# Altium PCB DistBoard.PcbDoc
Units mil, origin at the board's own origin, x right, y up, seen from the top; angles counter-clockwise.
Board outline 2505 x 2000 mil, 2 copper layers (Top Layer, Bottom Layer); 17 components, 9 nets, 48 pads, 7 vias.
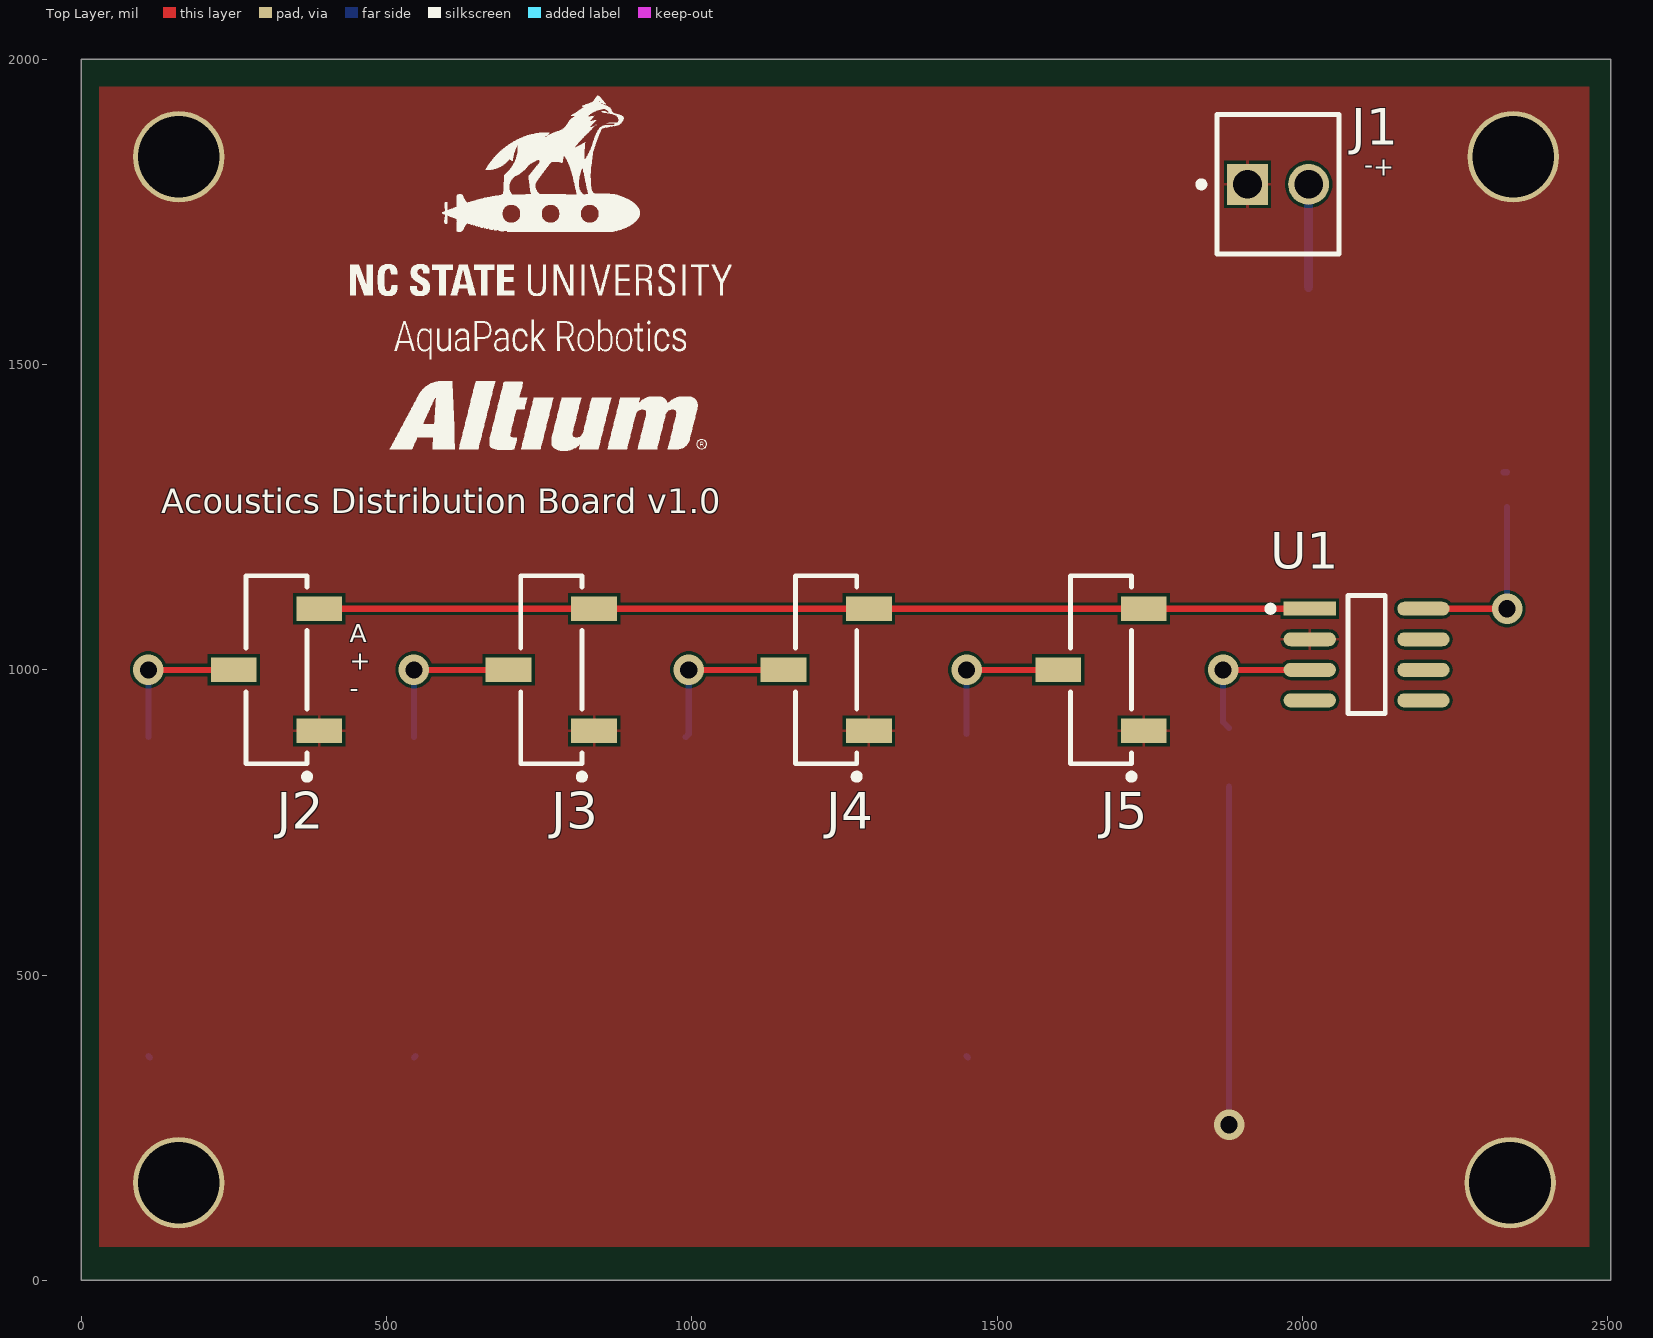
[diagram p0: Top Layer view]
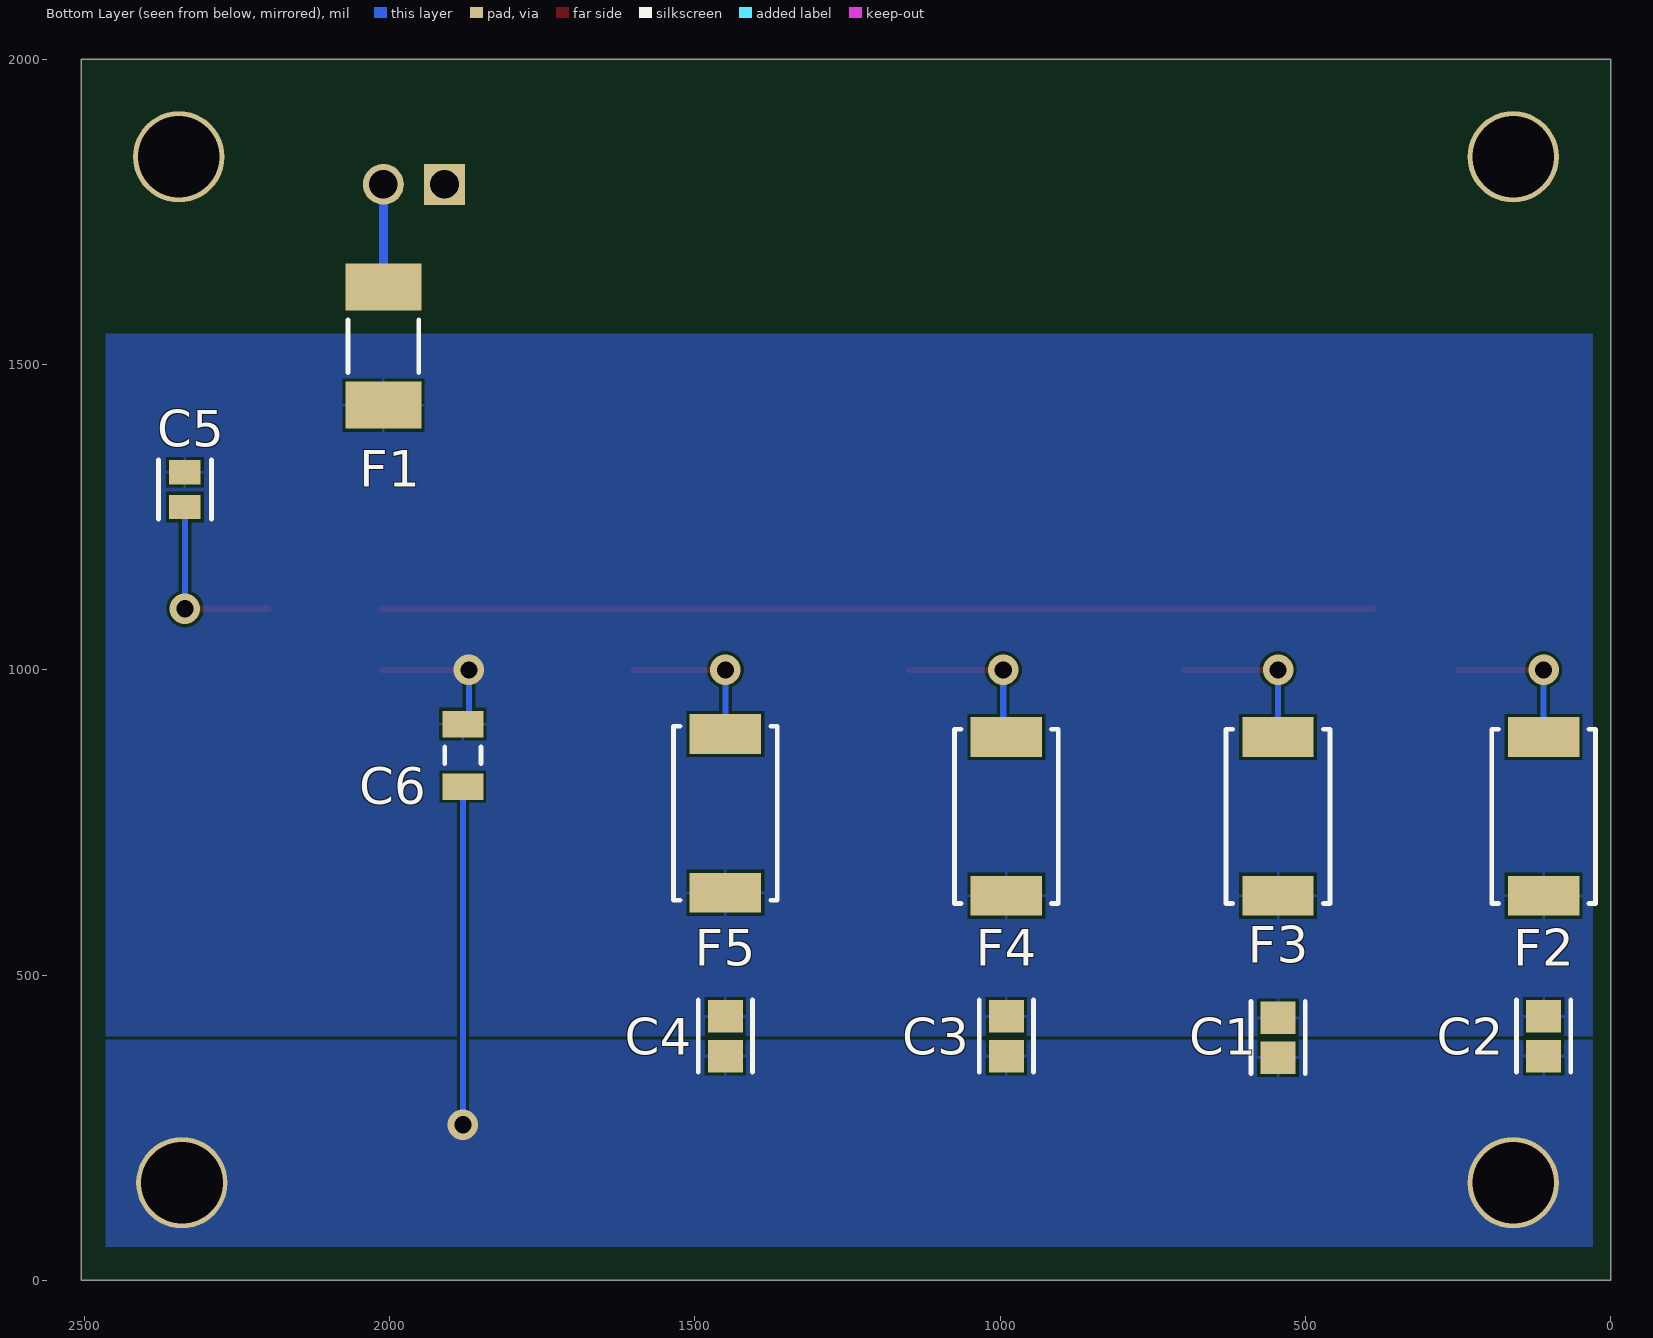
[diagram p1: Bottom Layer view, seen from below]
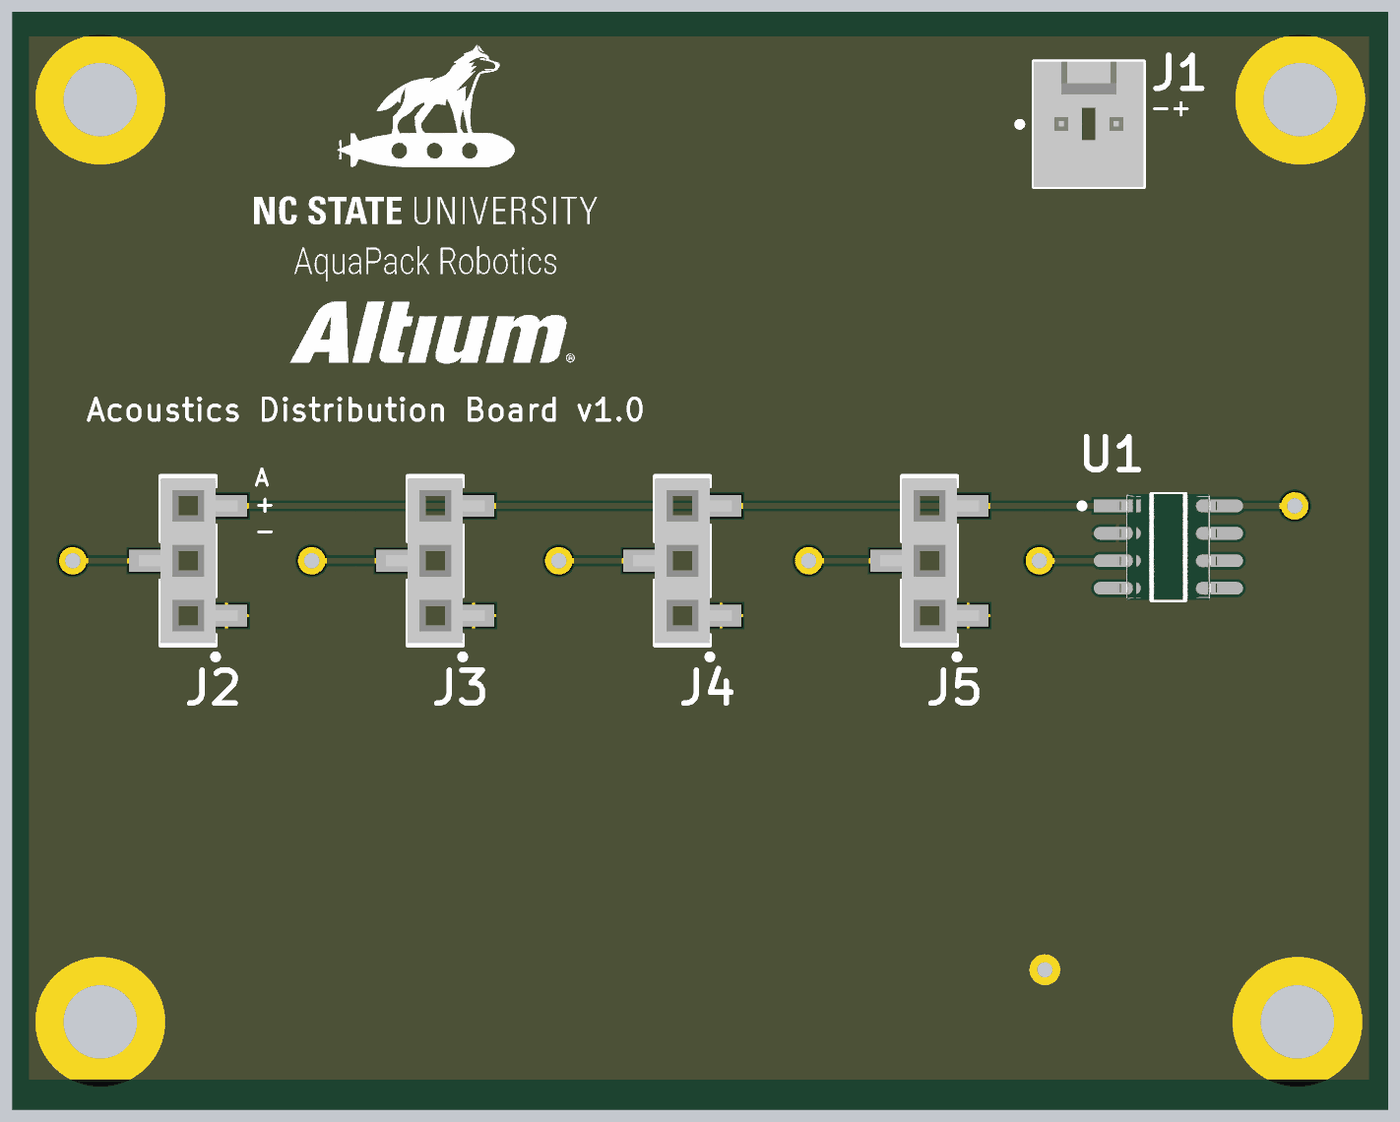
[diagram p2: 3D render of the assembled board from above, using the file's embedded part models]
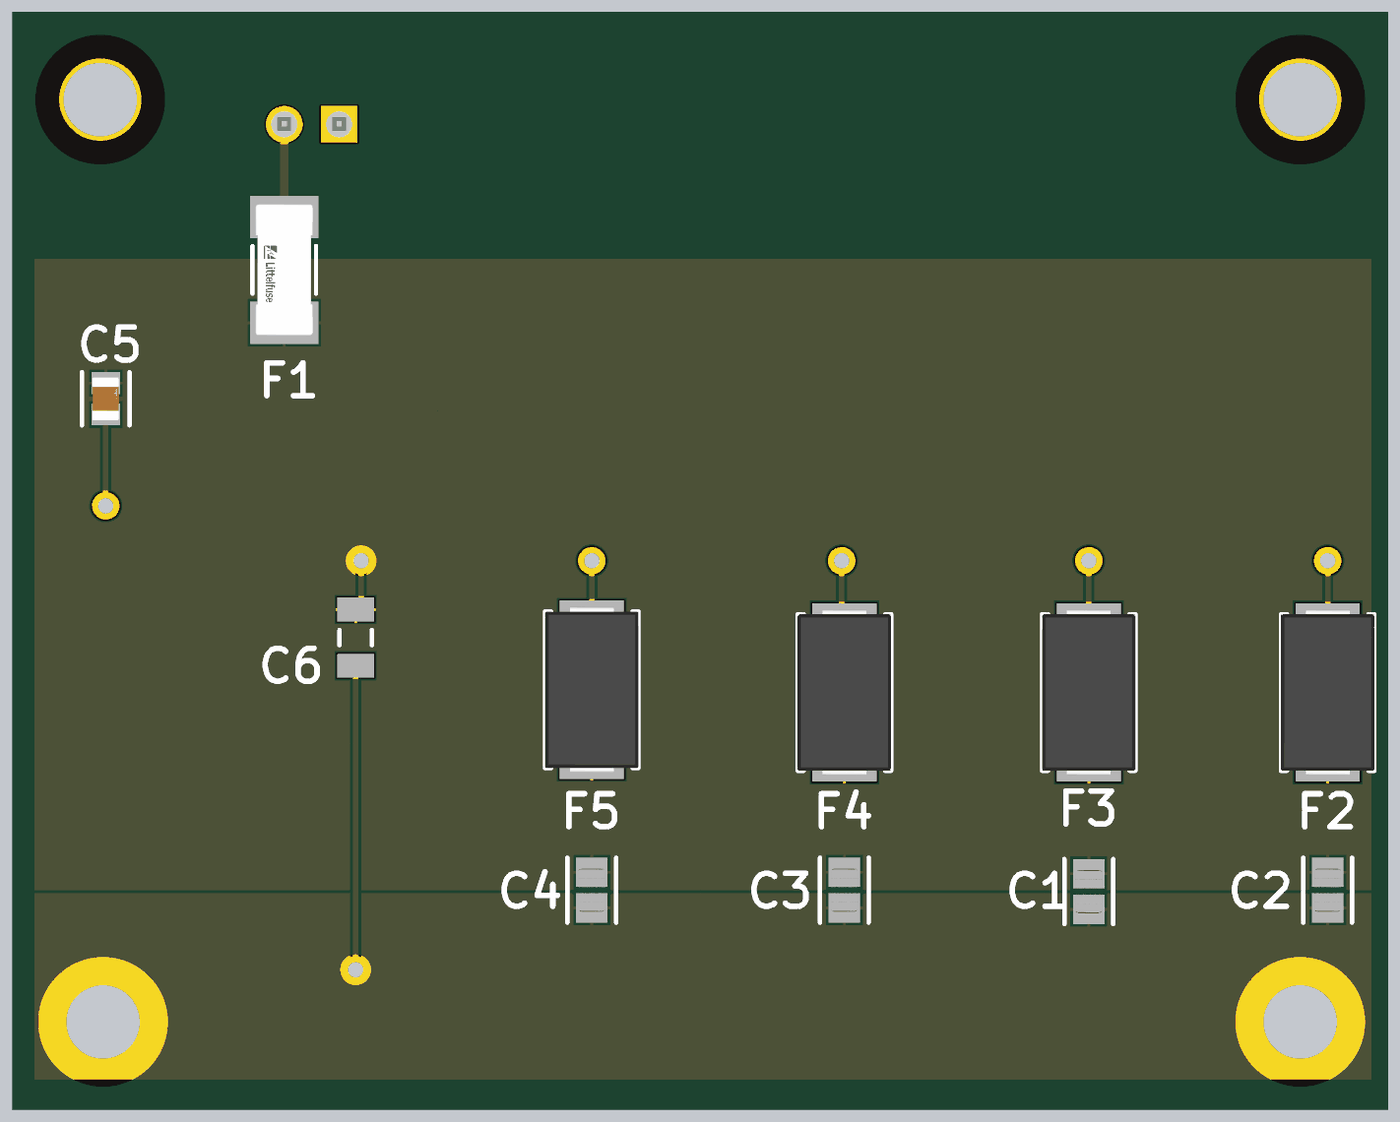
[diagram p3: 3D render of the assembled board from below, using the file's embedded part models]

## Layer stack, top to bottom
Top Solder: solder mask 0.4, Solder Resist, Dk 3.5
Top Layer: signal copper 1.4
Dielectric 1: dielectric 12.6, FR-4, Dk 4.8
Bottom Layer: signal copper 1.4
Bottom Solder: solder mask 0.4, Solder Resist, Dk 3.5

## Board outline
0,2000 0,0 2505,0 2505,2000

## Design rules (kind name [scope] priority, off if disabled: settings)
BoardOutlineClearance [All] p1: gap=7.87 ignorepadtopadclearanceinfootprint=FALSE
Clearance [All] p1: gap=5 ignorepadtopadclearanceinfootprint=FALSE except(9.84: Arc-Hole Track-Hole SMDPad-Hole THPad-Hole Via-Hole Fill-Hole Poly-Hole Region-Hole Text-Hole)
ComponentClearance [All] p1: gap=5 collisioncheckmode=3 verticalgap=5 showdistances=TRUE
DiffPairsRouting [All] p1: maxlimit=10 minlimit=5 mostfreqgap=5 toplayer_minwidth=5 toplayer_maxwidth=1000 toplayer_prefwidth=5 bottomlayer_minwidth=5 bottomlayer_maxwidth=1000 bottomlayer_prefwidth=5 maxuncoupledlength=500
Height [All] p1: minheight=0 maxheight=71497.94 prefheight=500
HoleSize [All] p1: absolutevalues=TRUE maxlimit=248.03 minlimit=11.81 maxpercent=80.000 minpercent=20.000
HoleToHoleClearance [All] p1: gap=9.84 allowstackedmicrovias=FALSE
MinimumAnnularRing [All] p1: minimumring=3
MinimumSolderMaskSliver [All] p1: minsoldermaskwidth=0
PlaneClearance [All] p1: clearance=5
PlaneConnect PlaneConnectPowerPads [InPadClass('PowerPads')] p1: planeconnectstyle=Direct reliefexpansion=20 reliefentries=4 reliefconductorwidth=10 reliefairgap=10
PlaneConnect [All] p2: pad.planeconnectstyle=Relief pad.reliefexpansion=11.81 pad.reliefentries=4 pad.reliefconductorwidth=5 pad.reliefairgap=5 via.planeconnectstyle=Direct via.reliefexpansion=11.81 via.reliefentries=4 via.reliefconductorwidth=5 via.reliefairgap=5
PolygonConnect PolygonConnectPowerPads [All vs (InPadClass('PowerPads'))] p1: connectstyle=Direct reliefconductorwidth=10 reliefentries=4 polygonreliefangle="90 Angle" airgapwidth=10
PolygonConnect [All] p2: thpad.connectstyle=Relief thpad.reliefconductorwidth=5 thpad.reliefentries=4 thpad.polygonreliefangle="90 Angle" thpad.airgapwidth=5 smdpad.connectstyle=Relief smdpad.reliefconductorwidth=5 smdpad.reliefentries=4 smdpad.polygonreliefangle="90 Angle" smdpad.airgapwidth=5 via.connectstyle=Direct via.reliefconductorwidth=5 via.reliefentries=4 via.polygonreliefangle="90 Angle" via.airgapwidth=5
RoutingVias [All] p1: holewidth=11.81 width=23.62 viastyle="Through Hole" minholewidth=11.81 minwidth=23.62 maxholewidth=23.62 maxwidth=259.84
SilkToSilkClearance [All] p1: silktosilkclearance=0
SilkToSolderMaskClearance [IsPad] p1: minsilkscreentomaskgap=5 clearancetoexposedcopper=TRUE
SolderMaskExpansion [All] p1: expansion=2.95 istentingtop=FALSE
Width [All] p1: maxlimit=1000 minlimit=5 preferedwidth=5 minimp=50.000000 maximp=50.000000 favimp=50.000000
20 further rules are at their usual default settings.

## Components (designator, comment, footprint, x,y, rotation, side; value= is the part's Value field where it differs from the comment)
C1 "GCJ21BR71H105KA01L" FP-GCJ21B-0_3-IPC_B 545,397.49 r90 bottom value=1uF
C2 "GCJ21BR71H105KA01L" FP-GCJ21B-0_3-IPC_B 110,400 r90 bottom value=1uF
C3 "GCJ21BR71H105KA01L" FP-GCJ21B-0_3-IPC_B 990,400 r90 bottom value=1uF
C4 "GCJ21BR71H105KA01L" FP-GCJ21B-0_3-IPC_B 1450,400 r90 bottom value=1uF
C5 "GCD21BR71H104KA01L" FP-GCD21B-0_15-IPC_C 2335,1295 r90 bottom value=100nF
C6 "C1206C105K5RACTU" CAPC3216X110X50LL20T25 1880,860 r270 bottom
F1 "045201.5MRL" FP-0452-MFG 2010,1530 r270 bottom value=0.093Ω
F2 "0459.250UR" LFUS-459_V 110,760 r90 bottom
F3 "0459.250UR" LFUS-459_V 545,760.08 r90 bottom
F4 "0459.250UR" LFUS-459_V 990,760 r90 bottom
F5 "0459.250UR" LFUS-459_V 1450,765 r90 bottom
J1 "22-27-2021" MOLX-22-27-2021_V 1960,1795 r0 top
J2 "SSM-103-L-SV" SMTC-SSM-103-X-SV 320,1000 r90 top
J3 "SSM-103-L-SV" SMTC-SSM-103-X-SV 770,1000 r90 top
J4 "SSM-103-L-SV" SMTC-SSM-103-X-SV 1220,1000 r90 top
J5 "SSM-103-L-SV" SMTC-SSM-103-X-SV 1670,1000 r90 top
U1 "TLE2426CDR" FP-D0008A-IPC_B 2105,1025 r0 top

## Footprints (in the part's own frame and the unit in brackets; to place one, negate y for a bottom-side part, rotate by r counter-clockwise, add the part's x,y. Pads: shape width x height; smd on the part's side, far side on the other; paste and mask are expansions set on the pad)
CAPC3216X110X50LL20T25 [mm] "Chip Capacitor, 2-Leads, Body 3.20x1.60mm, IPC High Density"
  rect 1.1x1.7 smd: 1(-1.3,0) 2(1.3,0)
  silkscreen extent -0.35,-0.75 0.35,0.75, body extent -1.7,-0.9 1.7,0.9, height 1.1
FP-0452-MFG [mil]
  rect 77x124 smd paste+0 mask+0: 1(-96.5,0) 2(96.5,0)
  silkscreen extent -43,-58 43,58, body extent -120,-53 120,53, height 116
FP-D0008A-IPC_B [mil]
  rect 85.4x22.92 smd paste+0 mask+0: 1(-93.06,75)
  rrect100% 85.4x22.92 smd paste+0 mask+0: 2(-93.06,25) 3(-93.06,-25) 4(-93.06,-75) 5(93.06,-75) 6(93.06,-25) 7(93.06,25) 8(93.06,75)
  silkscreen extent -162,-97 31,97, body extent -146,-106 146,106, height 10
FP-GCD21B-0_15-IPC_C [mil]
  rect 39.6x51.5 smd paste+0 mask+0: 1(-28.59,0) 2(28.59,0)
  silkscreen extent -48,-43 48,43, body extent -39,-25 39,25, height 55
FP-GCJ21B-0_3-IPC_B [mil]
  rect 53.28x57.33 smd paste+0 mask+0: 1(-32.49,0) 2(32.49,0)
  silkscreen extent -59,-44 59,44, body extent -39,-25 39,25, height 57
LFUS-459_V [mm] "SMD, 2-Leads, Body 7.24x4.32mm"
  rect 1.65x2.97 smd: 1(-3.3,0) 2(3.3,0)
  silkscreen extent -3.62,-2.16 3.62,2.16, body extent -3.84,-2.16 3.84,2.16, height 3.05
MOLX-22-27-2021_V [mm] "Header, 2-Leads, Body 5.8x5.08mm"
  rect 1.7x1.7 hole 1.19: 1(-1.27,0)
  round 1.7 hole 1.19: 2(1.27,0)
  silkscreen extent -3.31,-2.9 2.54,2.9, body extent -2.54,-2.9 2.54,2.9, height 11.72
SMTC-SSM-103-X-SV [mm] "C.L. Surface Mount Socket Strip, 3 Pins, Vertical, 2.54 mm Pitch, Female"
  rect 1.02x1.905 smd: 1(-2.54,-1.777) 2(0,1.777) 3(2.54,-1.777)
  silkscreen extent -4.57,-1.4 3.91,1.27, body extent -3.81,-2.29 3.81,2.29, height 7.42

## Part data
C1 C2 C3 C4: library part CMP-06035-043290-1, Capacitance=1uF, Case Code (Imperial)=0805, Case Code (Metric)=2012, Dielectric=X7R, Manufacturer=Murata, Max Operating Temperature=125°C, Min Operating Temperature=-55°C, Package Quantity=3000, Ratings=AEC-Q200, Tolerance=10%, Voltage Rating=50V, Case/Package=0805, Features="Soft Termination", Height=1.25mm, Lead Free="Lead Free", Length=0.079inch, Manufacturer Part Number=GCJ21BR71H105KA01L, Mount="Surface Mount", Packaging="Tape and Reel", Termination=SMD/SMT, Thickness=0.057inch, Voltage Rating (DC)=50V, Weight=0.000335oz, Width=0.049inch
C5: library part CMP-06035-045527-1, Capacitance=100nF, Case Code (Imperial)=0805, Case Code (Metric)=2012, Dielectric=X7R, Manufacturer=Murata, Max Operating Temperature=125°C, Min Operating Temperature=-55°C, Package Quantity=3000, Ratings=AEC-Q200, Tolerance=10%, Voltage Rating=50V, Case/Package=0805, Depth=1.25mm, Height=1.25mm, Length=2mm, Manufacturer Part Number=GCD21BR71H104KA01L, Mount="Surface Mount", Packaging="Tape and Reel", Termination=SMD/SMT, Thickness=0.049inch, Voltage Rating (DC)=50V, Weight=0.000335oz, Width=0.049inch
C6: library part CMP-2000-06011-1, "Chip Capacitor, 1 uF, +/- 10%, 50 V, -55 to 125 degC, 1206 (3216 Metric), RoHS, Tape and Reel", Capacitance=1uF, Capacitance - nF=1000nF, Case Code - in=1206, Case Code - mm=3216, Case Height=1mm, Case Length=3.2mm, Case Width=1.6mm, Dielectric=X7R, Manufacturer=Kemet, Maximum Operating Temperature=+125C, Minimum Operating Temperature=-55C, Operating Temperature Range=-55Cto+125C, Package / Case=1206(3216metric), Package Description="2-Pin Surface Mount Device, Body 3.2 x 1.6 mm", Temperature Coefficient / Code=+/-15%, Tolerance=10%, Voltage Rating=50V, Brand=Kemet, Class=Class1, Datasheet URL=http://www.kemet.com/docfinder?Partnumber=C1206C105K5RACTU, Datasheet Version=02/2016, Dimensions=1.6mmWx3.2mmLx1mmH, Factory Pack Quantity=2500, Manufacturer URL=http://www.kemet.com/, Mounting Technology=SurfaceMount, Package Reference=1206, Packaging=Reel, Product=GeneralTypeMLCCs, Product Category=MultilayerCeramicCapacitorsMLCC-SMD/SMT, RoHS=Details, Series=C1206C, Termination Style=SMD/SMT, Type=SMDMLCCX7R6.3-250VDCCommericalGrade, Voltage Rating DC=50V
F1: library part CMP-08605-000038-1, "FUSE BRD MNT 1.5A 125VAC/VDC SMD", Fuse Current=1.5A, Fuse Interrupt Ac Current=50A, Fuse Interrupt Dc Current=300A, Manufacturer="Littelfuse Inc", Max Fuse Ac Voltage=125V, Package=0452, Resistance=0.093Ω, Temperature="-55°C to +125°C", Temperature Range High=+125°C, Temperature Range Low=-55°C, Automotive=No, Category=Fuse, ComponentLink2Description=Datasheet, ComponentLink2URL=https://www.littelfuse.com/~/media/electronics/datasheets/fuses/littelfuse_fuse_452_454_datasheet.pdf.pdf, Device Class L1="Circuit Protection", Device Class L2=Fuses, Device Class L3=unset, Digikey Description="FUSE BRD MNT 1.5A 125VAC/VDC SMD", Fuse Blow Speed=Slow, Fuse I2T=3.65A2Sec, Height=2.94mm, Lead Free=Yes, Manufacturer Part Number=045201.5MRL, Max Fuse Dc Voltage=125V, Mouser Description="Surface Mount Fuses 125V 1.5A", Octopart=https://octopart.com/045201.5mrl-littelfuse-566412, RoHS=TRUE, Voltage Rating=125V
F2 F3 F4 F5: library part CMP-2000-05720-1, "Fuse, 125 V, 250 mA, -55 to 125 degC, 2-Pin SMD, RoHS, Tape and Reel", Case Height=3.05mm, Case Length=7.24mm, Case Width=4.32mm, Current Rating=250mA, Interrupt Rating=300Amps, Manufacturer=Littelfuse, Operating Temperature Range=-55Cto+125C, Package Description="2-Pin Surface Mount Device, Body 7.24 x 4.32 mm", Package Reference=459, Resistance=665mOhms, Voltage Rating DC=125V, Brand=Littelfuse, Datasheet URL=http://www.littelfuse.com/~/media/electronics/datasheets/fuses/littelfuse_fuse_459_datasheet.pdf.pdf, Datasheet Version=11/2015, Dimensions=7.24mmLx4.32mmW, Factory Pack Quantity=500, Fuse Size / Group=PICO, Fuse Type=FastBlow, Manufacturer URL=http://www.littelfuse.com/, Mounting Technology=SurfaceMount, Packaging=Reel, Product=SurfaceMountFuses, Product Category=SurfaceMountFuses, Product Type=SurfaceMountFuse, RoHS=Details, Series=459, Type=PicoSurfaceMountVeryFastActingFuse
J1: library part CMP-2000-05537-1, "Male Header, Pitch 2.54 mm, 1 x 2 Position, Height 11.7 mm, Tail Length 3.56 mm, 0 to 75 degC, RoHS, Bulk", Current - Max=4A, Manufacturer=Molex, Operating Temperature=0°Cto+75°C, Package Description="2-Leads Header, Body 5.08 x 5.8 mm, Pitch 2.54 mm", Package Version="Rev. BC, 02/2012", PartNumber=0022272021, Voltage - Max=250V, Contact material=Tinplatedbrass, Current Rating=4A, Datasheet URL=http://www.molex.com/pdm_docs/sd/022272021_sd.pdf, Datasheet Version="Rev. F, 06/2009", Housing material=Nylon(UL94V-0), Manufacturer URL=http://www.molex.com/, Mounting Technology=ThroughHole, No. of Positions=2, No. of Rows=1, Orientation=Vertical, Package Reference=22-27-2021, Pitch=2.54mm, Voltage Rating=250V
J2 J3 J4 J5: library part CMP-1023-00201-1, Manufacturer=Samtec, Temperature Range="-55 to 125 degC", ComponentLink1Description="Manufacturer URL", ComponentLink1URL=http://www.samtec.com, ComponentLink2Description=Datasheet, ComponentLink2URL=http://www.samtec.com/documents/webfiles/pdf/SSM_SM.PDF, ComponentLink3Description="Package Specification", ComponentLink3URL=http://www.samtec.com/documents/webfiles/cpdf/SSM-1XX-XXX-XX-XX-XX-X-XX-XX-MKT.pdf, DatasheetVersion=F-214, Manufacturer Part Number=SSM-103-L-SV, Mounting Technology="Surface Mount", Orientation=Vertical, PackageDescription=".100 C.L. Surface Mount Socket Strip", PackageReference=SSM-103-X-SV, PackageVersion="CR, 9/1998", PartNumber=SSM-103-L-SV, Pitch="2.54 mm", RoHS=True
U1: library part CMP-04916-000011-1, Case/Package=SOIC, Manufacturer="Texas Instruments", Max Input Voltage=40V, Max Operating Temperature=125°C, Max Output Current=20mA, Max Output Voltage=20V, Min Operating Temperature=-55°C, Min Output Voltage=2V, Operating Supply Current=400uA, Package Quantity=1, Temperature Coefficient=35ppm/°C, Tolerance=1%, Height=1.58mm, Lead Free="Lead Free", Length=4.9mm, Manufacturer Part Number=TLE2426CDR, Mount="Surface Mount", Number of Pins=8, Output Current=20mA, Output Type=Adjustable, Output Voltage=20V, Packaging="Tape and Reel", Radiation Hardening=No, REACH SVHC="No SVHC", Reference Type="Ground Reference (Virtual)", Reference Voltage=20V, Weight=0.002677oz, Width=3.91mm

## Free pads (board coordinates)
  round 149.61 hole 133.86 mask+43.31: 1(160,160) 1(160,1840) 1(2340,160) 1(2345,1840)

## Via types
v1: diameter 50, hole 28, Top Layer to Bottom Layer, 7 vias

## Nets (pads, with @x,y where several pads share a name; then routed paths per layer and width w, separated by ;. In a path a pad name is that pad's centre, name@x,y a point inside that pad or via, vN(x,y) a via of type N, cw(c..) or ccw(c..) an arc to the next point about the centre after c; other vN are vias at no path point)
AGND: J2.3 J3.3 J4.3 J5.3 U1.1 | length 1622
  Top Layer w10: J2.3 J3.3 J4.3 J5.3 U1.1
GND: C1.1 C2.1 C3.1 C4.1 C6.2 J1.1 J2.1 J3.1 J4.1 J5.1 pad.1 U1.2 | length 564.4
  Bottom Layer w10: C2.1 C2.1@112.51,365 ; C1.1 C1.1@547.51,367.51 ; C4.1 C4.1@1452.51,365 ; v1(1880,255) C6.2
NetF1_1: F1.1 J1.2 | length 168.5
  Bottom Layer w15: F1.1 J1.2
NetF2_2: F2.2 J2.2 | length 250.1
  Top Layer w10: v1(110,1000) J2.2
  Bottom Layer w10: F2.2 v1(110,1000)
NetF3_2: F3.2 J3.2 | length 265
  Top Layer w10: v1(545,1000) J3.2
  Bottom Layer w10: F3.2 v1(545,1000)
NetF4_2: F4.2 J4.2 | length 267.2
  Top Layer w10: v1(995,1000) J4.2
  Bottom Layer w10: F4.2 995,894.92 v1(995,1000)
NetF5_2: F5.2 J5.2 | length 255.1
  Top Layer w10: v1(1450,1000) J5.2
  Bottom Layer w10: F5.2 v1(1450,1000)
NR: C5.1 U1.8 | length 303.4
  Top Layer w10: U1.8 v1(2335,1100)
  Bottom Layer w10: v1(2335,1100) C5.1
VCC: C1.2 C2.2 C3.2 C4.2 C5.2 C6.1 F1.2 F2.1 F3.1 F4.1 F5.1 U1.3 | length 247.5
  Top Layer w10: v1(1870,1000) U1.3
  Bottom Layer w10: v1(1870,1000) 1870,914.53 C6.1@1880,904.53 ; C5.2@2329.05,1323.59 C5.2
pads on no net: U1.4 U1.5 U1.6 U1.7

## Polygon pours and split planes (outlines as drawn)
GND on Top Layer "GND_L01_P007" (solid, pour order 7): 2470,55 30,55 30,1955 2470,1955
VCC on Bottom Layer "VCC_L02_P010" (solid, pour order 10): 2465,1550 30,1550 30,400 2465,400
GND on Bottom Layer "GND_L02_P011" (solid, pour order 11): 2465,400 30,400 30,55 2465,55

## Silkscreen, mask and mechanical layers (free items; w line width, h text height)
Top Overlay:
  drawing of 44 lines, arcs and shapes, not listed
  text "+-" at 2150,1835 h30 r180
  text "Acoustics Distribution Board v1.0" at 131,1256 h40
  text "A / + / -" at 440,955 h30
Mechanical 1:
  lines w10: 0,0 0,2000 2505,2000 2505,1530 2505,0 0,0

## Dimensions
2505,0 to 2505,2000 on Mechanical 1
0,2000 to 2505,2000 on Mechanical 1